# Altium PCB OpAmpDevPCB.PcbDoc
Units mm, origin at the board's own origin, x right, y up, seen from the top; angles counter-clockwise.
Board outline 30 x 27 mm, 2 copper layers (Top Layer, Bottom Layer); 9 components, 7 nets, 26 pads, 3 vias.
Unrouted connection lines stored in the file: 2.
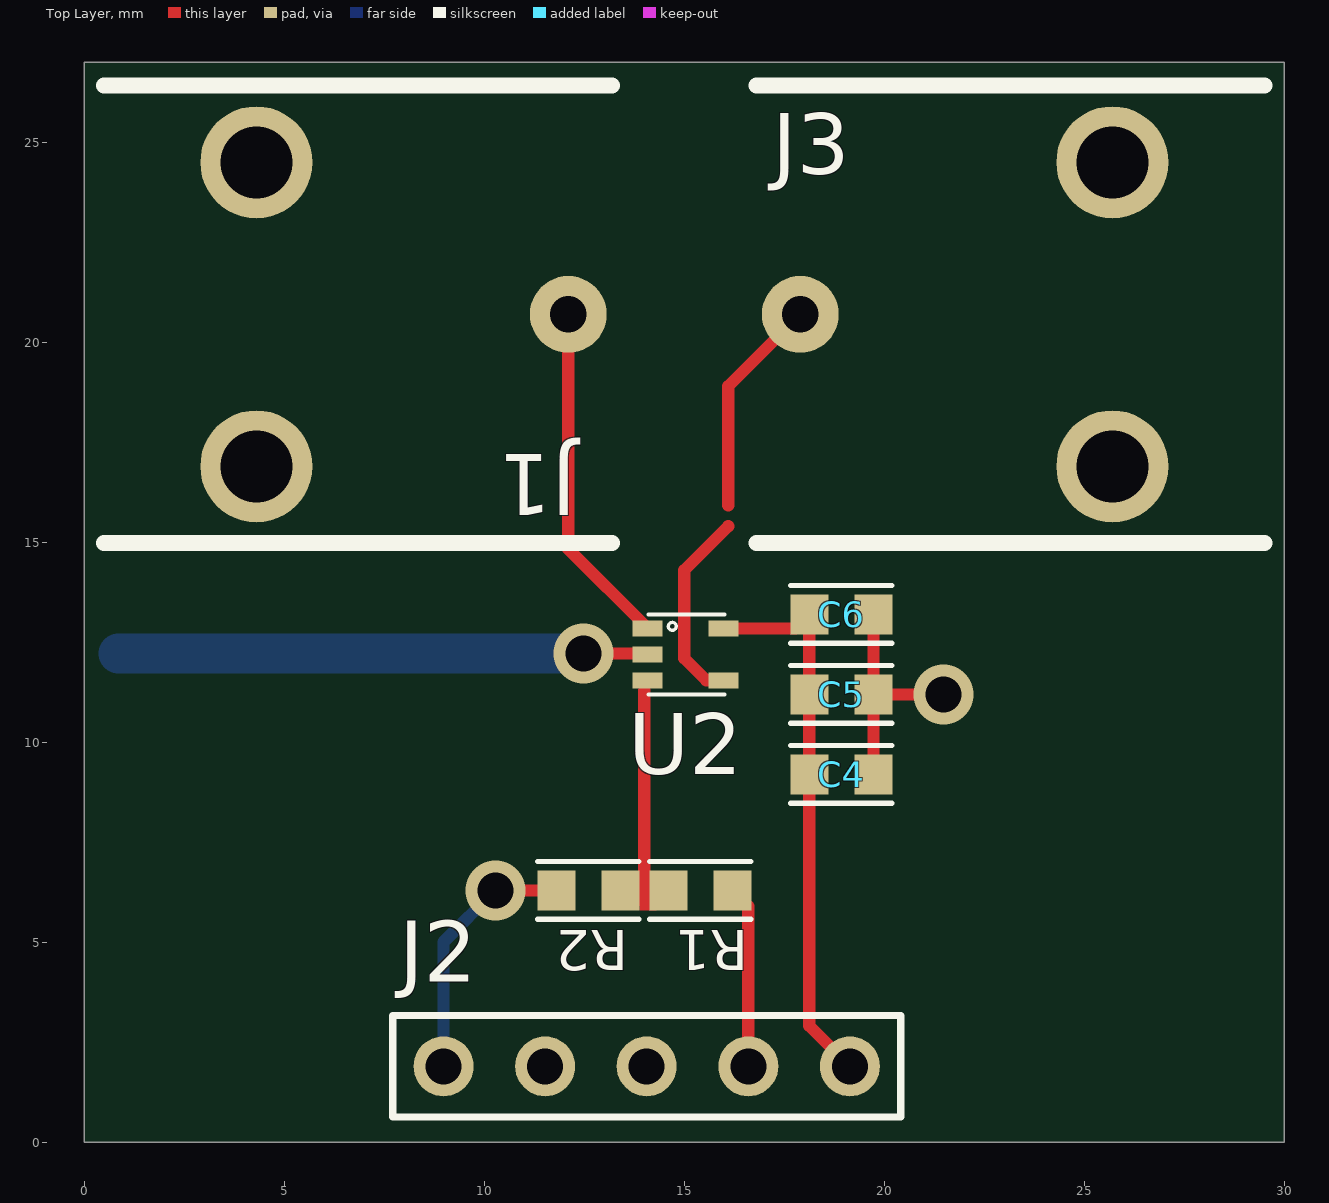
[diagram p0: Top Layer view]
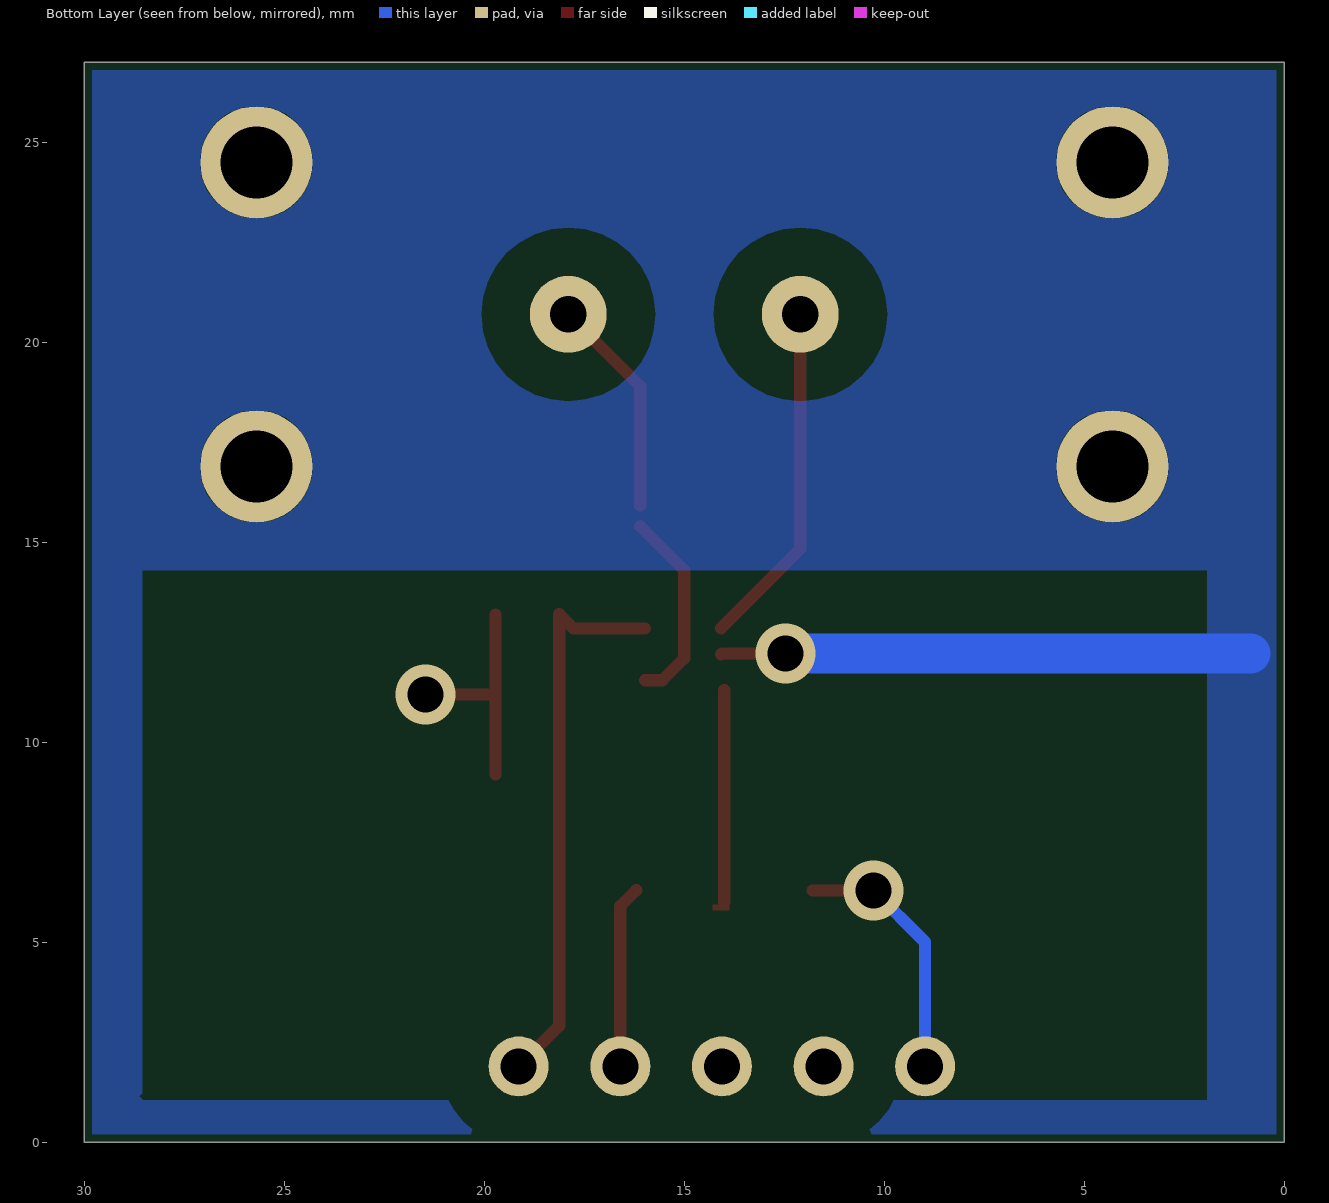
[diagram p1: Bottom Layer view, seen from below]

## Layer stack, top to bottom
Top Solder: solder mask 0.0102, Solder Resist, Dk 3.5
Top Layer: signal copper 0.0356
Dielectric 1: dielectric 0.32, FR-4, Dk 4.8
Bottom Layer: signal copper 0.0356
Bottom Solder: solder mask 0.0102, Solder Resist, Dk 3.5

## Board outline
0,0 0,27 30,27 30,0

## Design rules (kind name [scope] priority, off if disabled: settings)
Clearance Clearance_1 [InPolygon vs IsTrack or IsPad] p1: gap=1.2 ignorepadtopadclearanceinfootprint=FALSE
Clearance [All] p2: gap=0.2 ignorepadtopadclearanceinfootprint=FALSE
PlaneConnect [All] p1 off: planeconnectstyle=Relief reliefexpansion=0.508 reliefentries=4 reliefconductorwidth=0.254 reliefairgap=0.254
PolygonConnect [All] p1 off: connectstyle=Relief reliefconductorwidth=0.254 reliefentries=4 polygonreliefangle="90 Angle" airgapwidth=0.254
RoutingVias [All] p1: holewidth=0.711 width=1.27 viastyle="Through Hole" minholewidth=0.711 minwidth=1.27 maxholewidth=0.711 maxwidth=1.27
SolderMaskExpansion [All] p1: expansion=0.102
Width [All] p1: maxlimit=3 minlimit=0.2 preferedwidth=0.75
29 further rules are at their usual default settings.

## Components (designator, comment, footprint, x,y, rotation, side; value= is the part's Value field where it differs from the comment)
C4 "10000pF" 0603C 18.925,9.2 r0 top
C5 "1000pF" 0603C 18.925,11.2 r0 top
C6 "100pF" 0603C 18.925,13.2 r0 top
J1 "0731000105" 0731000105 4.3,20.7 r270 top
J2 "5-PoS Header 2.54mm" "2.54mm Pitch Header" 14.06,1.9 r180 top
J3 "0731000105" 0731000105 25.7,20.7 r90 top
R1 "12.4k" 0603C 15.4,6.3 r0 top
R2 "12.4k" 0603C 12.6,6.3 r0 top
U2 "MIC920YC5" MIC920 15.1,12.2 r90 top

## Footprints (in the part's own frame and the unit in brackets; to place one, negate y for a bottom-side part, rotate by r counter-clockwise, add the part's x,y. Pads: shape width x height; smd on the part's side, far side on the other; paste and mask are expansions set on the pad)
"2.54mm Pitch Header" [mm] "2.54mm Pitch Header"
  round 1.5 hole 0.9: 1(-5.08,0) 2(-2.54,0) 3(0,0) 4(2.54,0) 5(5.08,0)
  silkscreen extent -6.35,-1.27 6.35,1.27
0603C [mm]
  rect 0.95x1 smd: 1(-0.8,0) 2(0.8,0)
  silkscreen extent -1.27,-0.72 1.27,0.72, body extent -0.87,-0.47 0.87,0.47, height 0.9
0731000105 [mm] "BNC Connector Jack, Female Socket 50Ohm Through Hole, Right Angle Solder"
  round 1.92 hole 0.92: 1(0,7.8)
  round 2.8 hole 1.8: 2(-3.8,0) 2(3.8,0)
  silkscreen extent -5.72,-3.81 5.72,8.89
MIC920 [mm] "General Purpose Amplifier 1 Circuit SC-70-5"
  rect 0.4x0.75 smd mask+0.05: 1(0.65,1.016) 2(0,1.016) 3(-0.65,1.016) 4(-0.65,-0.884) 5(0.65,-0.884)
  silkscreen extent -1,-0.9 1,1

## Part data
C4 C5 C6: library part CPoly, "Cap Poly", Power_WV_SRF=35V
J1 J3: "BNC Connector Jack, Female Socket 50Ohm Through Hole, Right Angle Solder"
R1 R2: library part R, "Resistor", Tolerance=5%
U2: library part MIC920YC5-TR, "General Purpose Amplifier 1 Circuit SC-70-5"

## Via types
v1: diameter 1.5, hole 0.9, Top Layer to Bottom Layer, 3 vias

## Nets (pads, with @x,y where several pads share a name; then routed paths per layer and width w, separated by ;. In a path a pad name is that pad's centre, name@x,y a point inside that pad or via, vN(x,y) a via of type N, cw(c..) or ccw(c..) an arc to the next point about the centre after c; other vN are vias at no path point)
GND: C4.2 C5.2 C6.2 J1.2 J2.5 J3.2 R2.1 U2.2 | length 25.5
  Top Layer w0.3: v1(10.275,6.3) R2.1 ; v1(12.475,12.225) 14.059,12.225 U2.2 ; C5.2 C6.2 ; C4.2 C5.2 v1(21.475,11.2)
  Bottom Layer w0.305: J2.5 8.98,5.005 v1(10.275,6.3)
  Bottom Layer w1: 0.85,12.225 v1(12.475,12.225)
NetJ1_1: J1.1 U2.1 | length 8.7
  Top Layer w0.305: J1.1 12.1,14.834 U2.1
NetJ2_2: J2.2 R1.2 | length 4.6
  Top Layer w0.305: R1.2 16.6,5.9 J2.2
NetJ3_1: J3.1 | length 5.5
  Top Layer w0.305: 16.1,15.925 16.1,18.9 J3.1
NetR1_1: R1.1 R2.2 U2.3 | length 5.3
  Top Layer w0.305: 14,6 14,11.3
NetR3_1: U2.4 | length 5
  Top Layer w0.305: U2.4 15.55,11.55 15,12.1 15,14.3 16.1,15.4
VCC: C4.1 C5.1 C6.1 J2.1 U2.5 | length 14
  Top Layer w0.3: U2.5 17.775,12.85 C6.1
  Top Layer w0.305: C6.1 C5.1 C4.1 18.125,2.915 J2.1
pads on no net: J2.3 J2.4

## Polygon pours and split planes (outlines as drawn)
GND on Bottom Layer "Top Layer-No Net" (solid, remove dead copper, pour order 6): 0.2,26.8 29.8,26.8 29.8,0.2 0.2,0.2

## Other copper
Top Layer:
  rectangle net NetR1_1: 13.875,5.8 14.3,5.95
Bottom Layer:
  pour cut-out: 1.925,14.3 1.925,1.225 28.55,1.225 28.55,14.3

## Silkscreen, mask and mechanical layers (free items; w line width, h text height)
Mechanical 1:
  the board outline again, w0.1